# Altium PCB PCB_S.PcbDoc (part 1 of 2)
Units mm, origin at the board's own origin, x right, y up, seen from the top; angles counter-clockwise.
Board outline 160 x 80 mm, 4 copper layers (Top Layer, Layer 1, Layer 2, Bottom Layer), stack 0.603 mm thick; 122 components, 76 nets, 483 pads, 356 vias.
Unrouted connection lines stored in the file: 12.
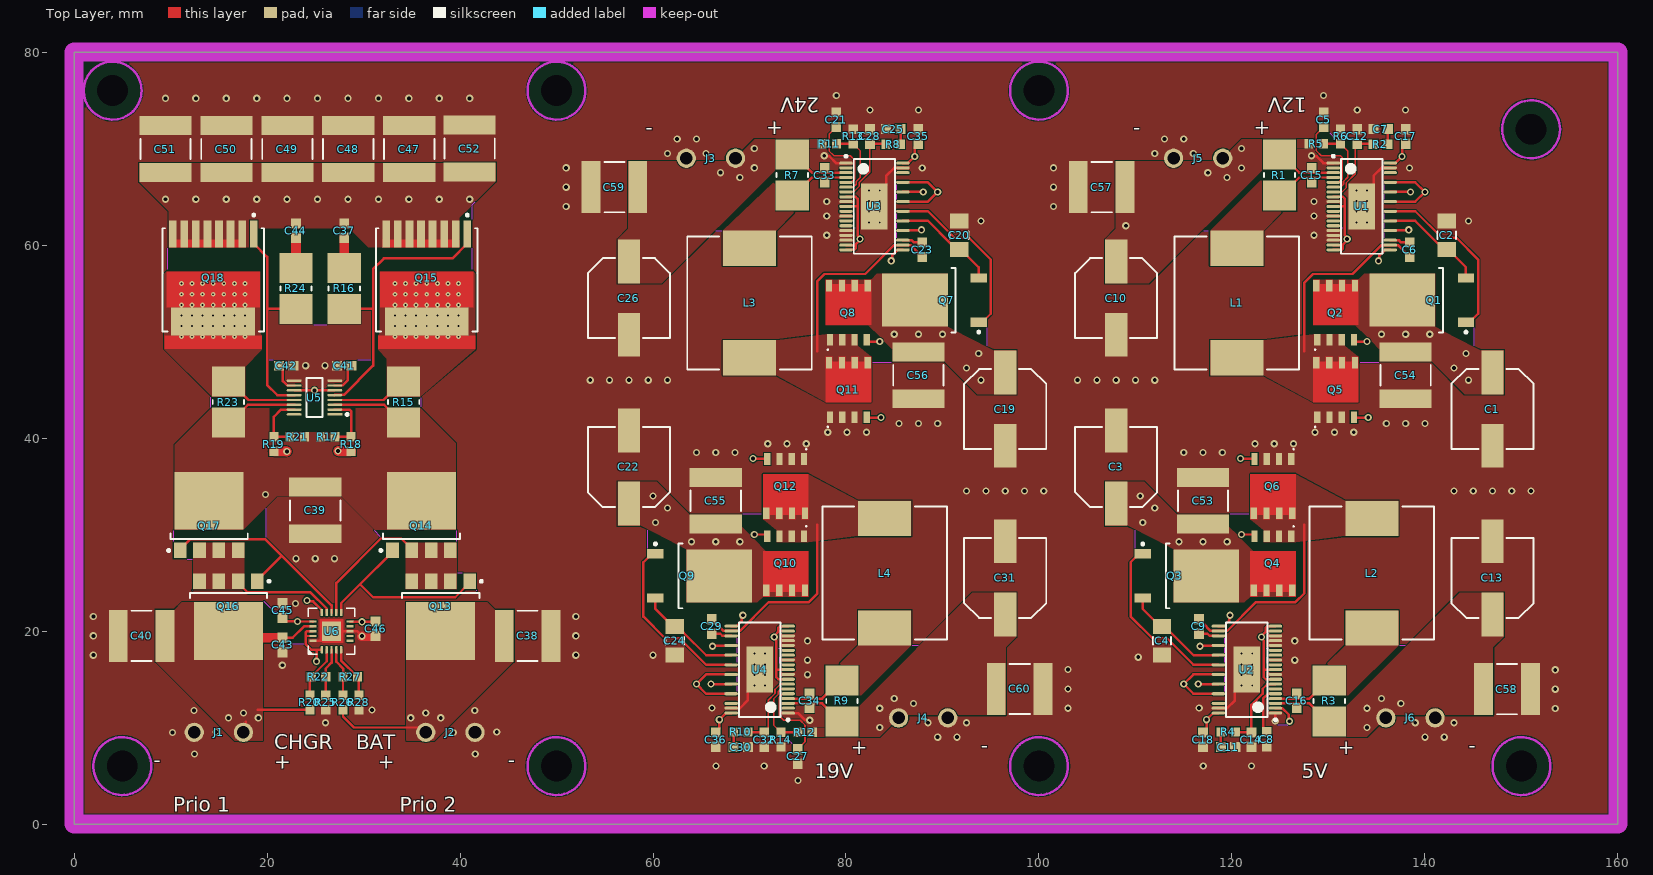
[diagram p0: Top Layer view]
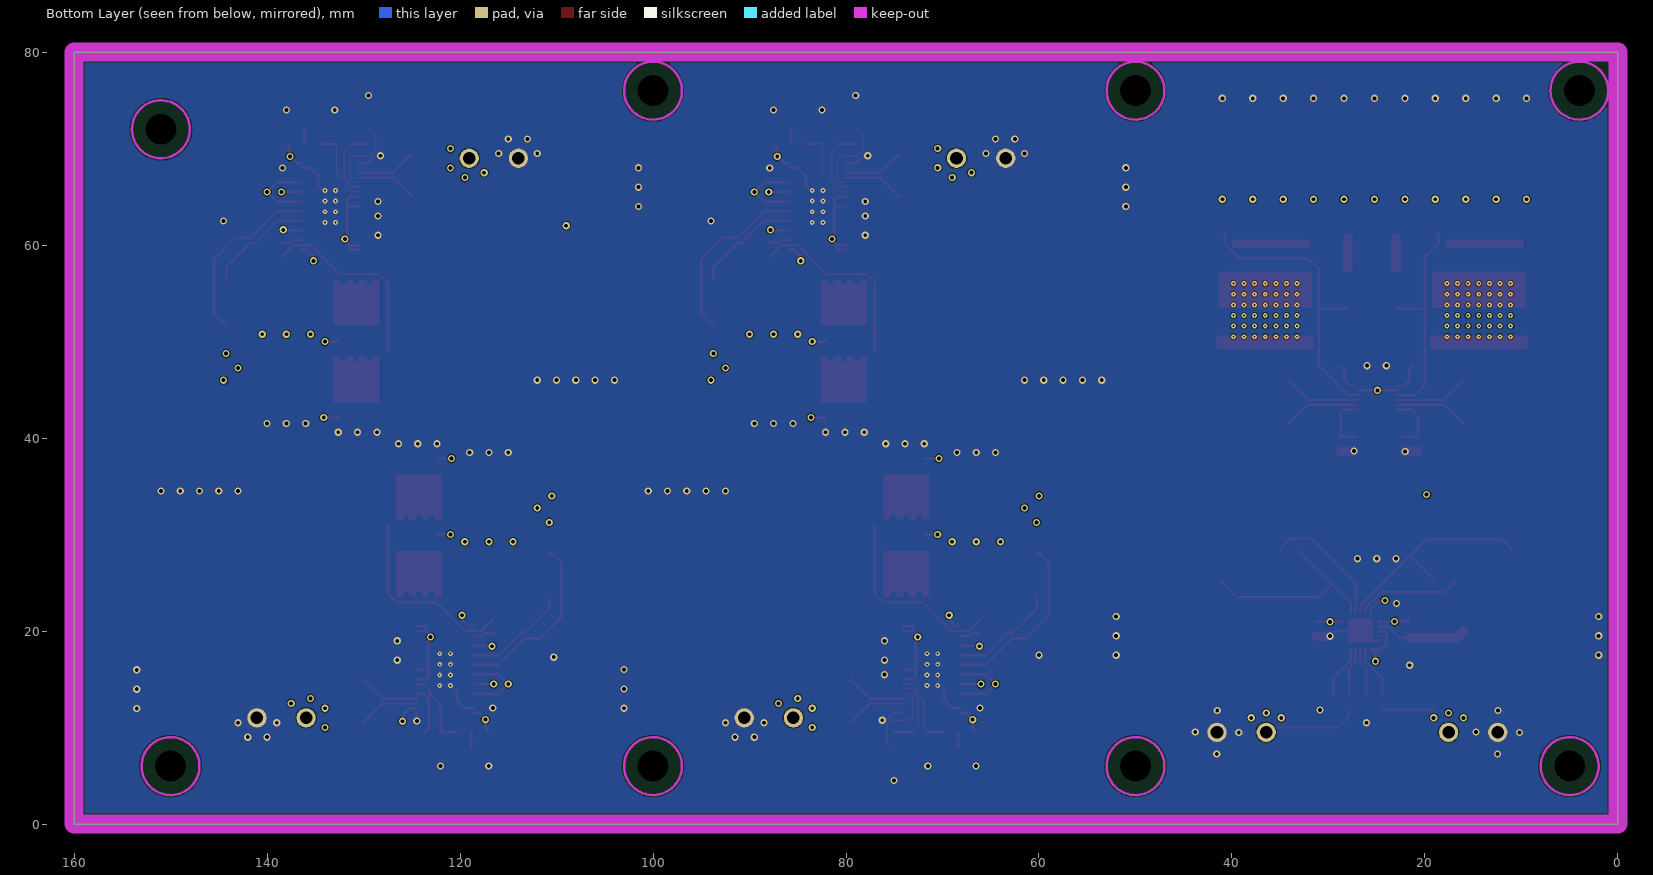
[diagram p1: Bottom Layer view, seen from below]
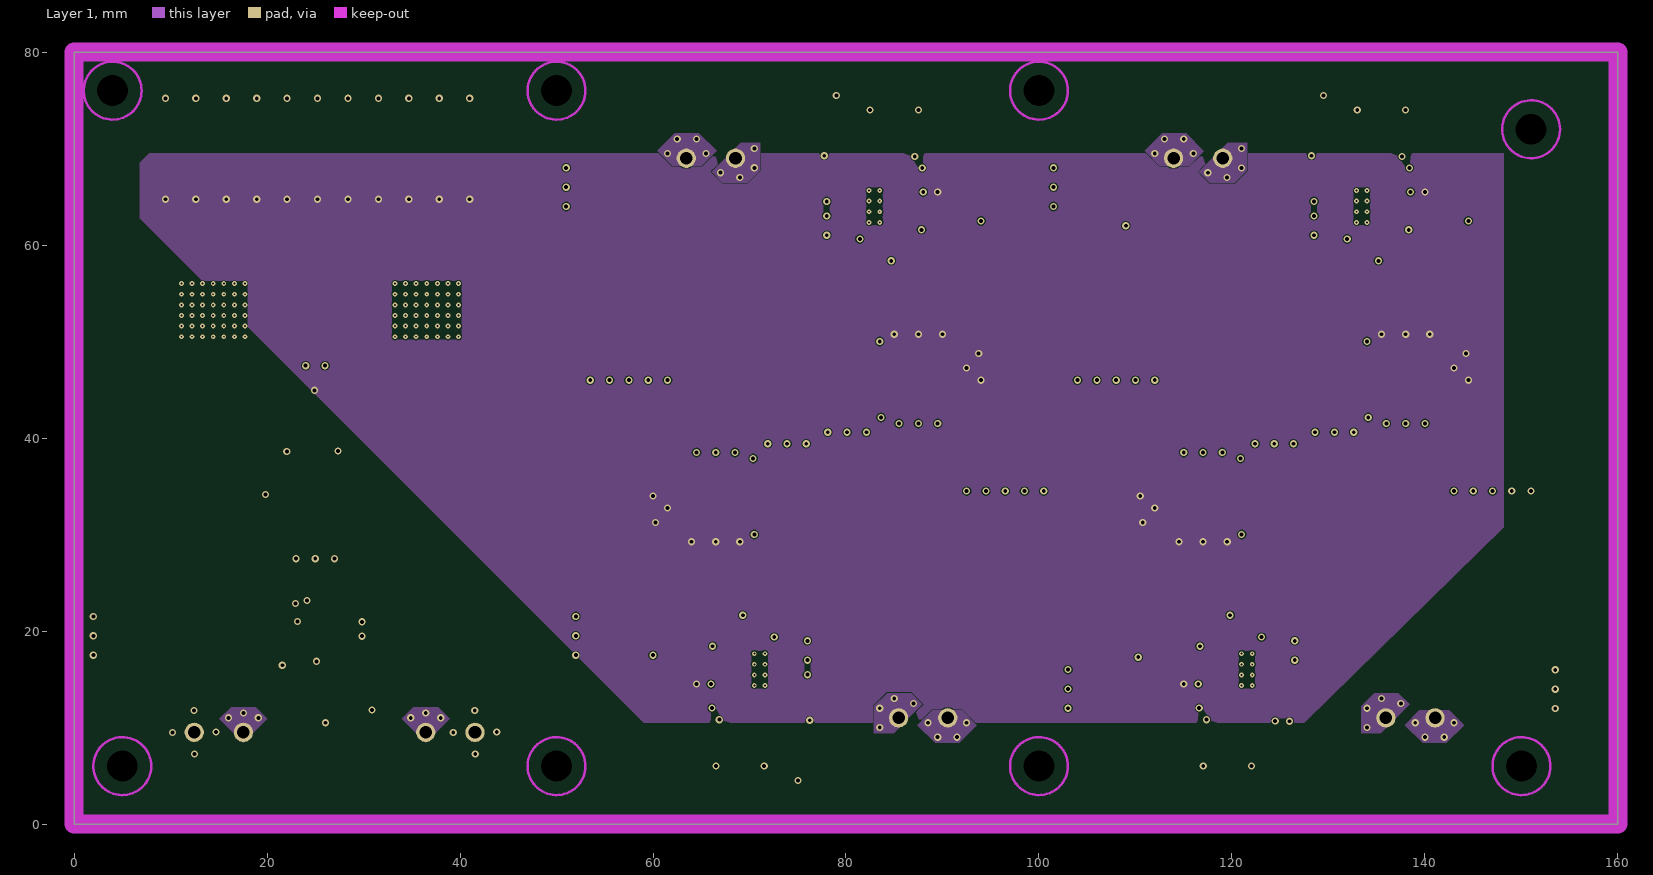
[diagram p2: Layer 1]
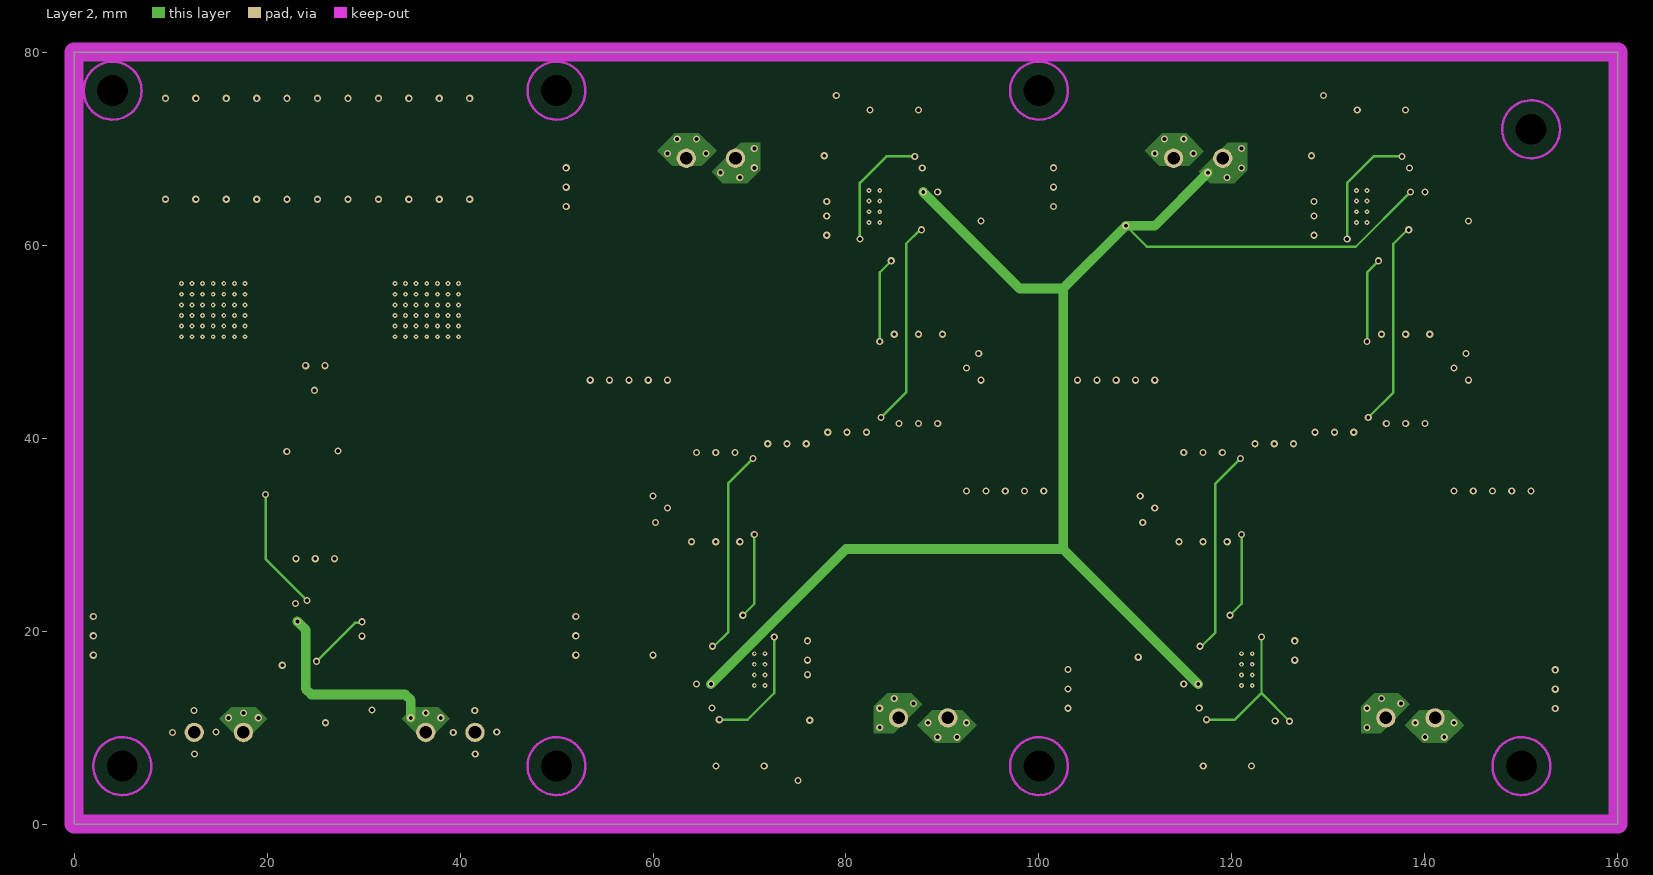
[diagram p3: Layer 2]
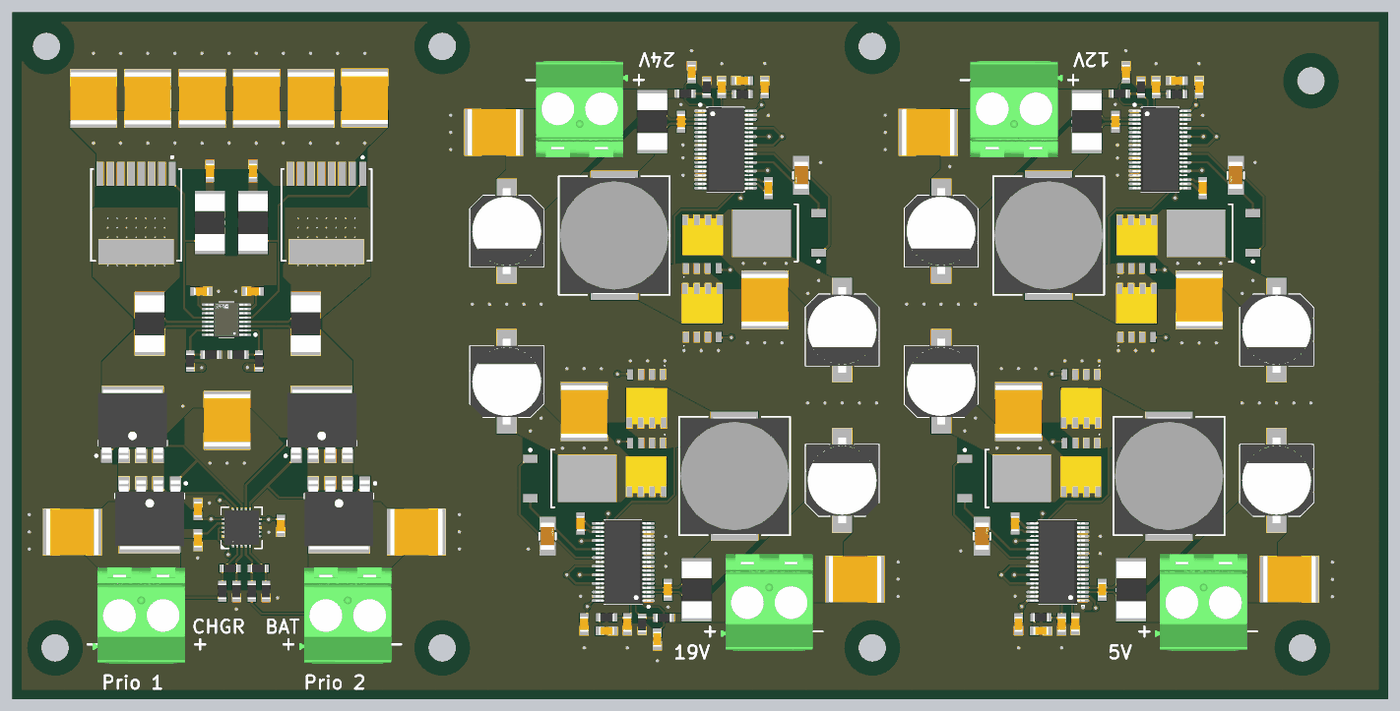
[diagram p5: 3D render of the assembled board from above, using the file's embedded part models]

## Layer stack, top to bottom
Top Solder: solder mask 0.0102, Solder Resist, Dk 3.5
Top Layer: signal copper 0.0356
Dielectric 2: prepreg 0.0711, PP-006, Dk 4.1
Layer 1: signal copper 0.035
Dielectric 1: dielectric 0.32, FR-4, Dk 4.8
Layer 2: signal copper 0.035
Dielectric 3: prepreg 0.0711, PP-006, Dk 4.1
Bottom Layer: signal copper 0.0356
Bottom Solder: solder mask 0.0102, Solder Resist, Dk 3.5

## Board outline
0,0 0,80 160,80 160,0

## Design rules (kind name [scope] priority, off if disabled: settings)
Clearance [All] p1: gap=0.1 ignorepadtopadclearanceinfootprint=TRUE
HoleSize [All] p1: absolutevalues=TRUE maxlimit=6.3 minlimit=0.025 maxpercent=80.000 minpercent=20.000
MinimumSolderMaskSliver [All] p1: minsoldermaskwidth=0.1
PolygonConnect [All] p1: connectstyle=Direct reliefconductorwidth=0.254 reliefentries=2 polygonreliefangle="90 Angle" airgapwidth=0.254
RoutingVias [All] p1: holewidth=0.711 width=1.27 viastyle="Through Hole" minholewidth=0.15 minwidth=0.25 maxholewidth=6.3 maxwidth=6.45
SilkToSolderMaskClearance [IsPad] p1: minsilkscreentomaskgap=0.15 clearancetoexposedcopper=TRUE
SolderMaskExpansion [All] p1: expansion=0.05 istentingtop=FALSE
SupplyNets "Schematic Supply Nets" [InNet('GND')] p1: voltage=0.000
Width [All] p1: maxlimit=1 minlimit=0.16 preferedwidth=0.254 minimp=50.000000 maximp=50.000000 favimp=50.000000
27 further rules are at their usual default settings.

## Classes and differential pairs
component class VoltageDivision: C1 C2 C3 C4 C5 C6 C7 C8 C9 C10 C11 C12 C13 C14 C15 C16 C17 C18 C19 C20 C21 C22 C23 C24 C25 C26 C27 C28 C29 C30 C31 C32 C33 C34 C35 C36 C57 C58 C59 C60 L1 L2 L3 L4 Q1 Q2 Q3 Q4 Q5 Q6 Q7 Q8 Q9 Q10 Q11 Q12 R1 R2 R3 R4 R5 R6 R7 R8 R9 R10 R11 R12 R13 R14 U1 U2 U3 U4
component class HotSwap: C37 C38 C39 C40 C41 C42 C43 C44 C45 C46 C47 C48 C49 C50 C51 C52 C53 C54 C55 C56 J1 J2 J3 J4 J5 J6 Q13 Q14 Q15 Q16 Q17 Q18 R15 R16 R17 R18 R19 R20 R21 R22 R23 R24 R25 R26 R27 R28 U5 U6

## Components (designator, comment, footprint, x,y, rotation, side; value= is the part's Value field where it differs from the comment)
C1 "EEE-FN1H151UP" CAPAE10083X105M 147,43 r270 top value=150µF
C2 "4.7uF 1206" FP-GRM31C-0_2-e0_3_0_8-IPC_A 142.25,61 r270 top value=4.7µF
C3 "EEE-FN1H151UP" CAPAE10083X105M 108,37 r90 top value=150µF
C4 "4.7uF 1206" FP-GRM31C-0_2-e0_3_0_8-IPC_A 112.75,19 r90 top value=4.7µF
C5 "100nF 0603" CAPC1608X10N 129.5,73 r90 top value=100nF
C6 "100nF 0603" CAPC1608X10N 138.417,59.528 r90 top value=100nF
C7 "CL10B472KB8NNNC" CAPC1608X10N 135.405,72.026 r0 top value=4.7nF
C8 "100nF 0603" CAPC1608X10N 123.6,8.775 r270 top value=100nF
C9 "100nF 0603" CAPC1608X10N 116.583,20.472 r270 top value=100nF
C10 "EEEFN1H181UP" CAPAE10083X105M 108,54.5 r270 top value=180µF
C11 "CL10B472KB8NNNC" CAPC1608X10N 119.595,7.974 r180 top value=4.7nF
C12 "100pF 0603" CAPC1608X10N 132.98,71.251 r270 top value=100pF
C13 "EEEFN1H181UP" CAPAE10083X105M 147,25.5 r90 top value=180µF
C14 "100pF 0603" CAPC1608X10N 122.02,8.749 r90 top value=100pF
C15 "1nF 0603" CAPC1608X10N 128.28,67.246 r90 top value=1nF
C16 "1nF 0603" CAPC1608X10N 126.72,12.754 r270 top value=1nF
C17 "100nF 0603" CAPC1608X10N 138,71.25 r270 top value=100nF
C18 "100nF 0603" CAPC1608X10N 117,8.75 r90 top value=100nF
C19 "EEE-FN1H151UP" CAPAE10083X105M 96.5,43 r270 top value=150µF
C20 "4.7uF 1206" FP-GRM31C-0_2-e0_3_0_8-IPC_A 91.75,61 r270 top value=4.7µF
C21 "100nF 0603" CAPC1608X10N 79,73 r90 top value=100nF
C22 "EEE-FN1H151UP" CAPAE10083X105M 57.5,37 r90 top value=150µF
C23 "100nF 0603" CAPC1608X10N 87.917,59.528 r90 top value=100nF
C24 "4.7uF 1206" FP-GRM31C-0_2-e0_3_0_8-IPC_A 62.25,19 r90 top value=4.7µF
C25 "CL10B472KB8NNNC" CAPC1608X10N 84.905,72.026 r0 top value=4.7nF
C26 "EEEFN1H181UP" CAPAE10083X105M 57.5,54.5 r270 top value=180µF
C27 "100nF 0603" CAPC1608X10N 75,7 r270 top value=100nF
C28 "100pF 0603" CAPC1608X10N 82.48,71.251 r270 top value=100pF
C29 "100nF 0603" CAPC1608X10N 66.083,20.472 r270 top value=100nF
C30 "CL10B472KB8NNNC" CAPC1608X10N 69.095,7.974 r180 top value=4.7nF
C31 "EEEFN1H181UP" CAPAE10083X105M 96.5,25.5 r90 top value=180µF
C32 "100pF 0603" CAPC1608X10N 71.52,8.749 r90 top value=100pF
C33 "1nF 0603" CAPC1608X10N 77.78,67.246 r90 top value=1nF
C34 "1nF 0603" CAPC1608X10N 76.22,12.754 r270 top value=1nF
C35 "100nF 0603" CAPC1608X10N 87.5,71.25 r270 top value=100nF
C36 "100nF 0603" CAPC1608X10N 66.5,8.75 r90 top value=100nF
C37 "CL10B103JB8NNNC" CAPC1608X10N 28,61.5 r90 top value=10nF
C38 "FS55X226K500EHG" CAPC5750X31N 47,19.5 r180 top value=22µF
C39 "FS55X226K500EHG" CAPC5750X31N 25,32.5 r90 top value=22µF
C40 "FS55X226K500EHG" CAPC5750X31N 7,19.5 r0 top value=22µF
C41 "100nF 0603" CAPC1608X10N 28,47.5 r180 top value=100nF
C42 "100nF 0603" CAPC1608X10N 22,47.5 r180 top value=100nF
C43 "100nF 0603" CAPC1608X10N 21.609,18.552 r270 top value=100nF
C44 "CL10B103JB8NNNC" CAPC1608X10N 23,61.5 r90 top value=10nF
C45 "100nF 0603" CAPC1608X10N 21.609,22.129 r90 top value=100nF
C46 "100nF 0603" CAPC1608X10N 31.246,20.225 r270 top value=100nF
C47 "FS55X226K500EHG" CAPC5750X31N 34.739,69.953 r270 top value=22µF
C48 "FS55X226K500EHG" CAPC5750X31N 28.421,69.953 r270 top value=22µF
C49 "FS55X226K500EHG" CAPC5750X31N 22.102,69.953 r270 top value=22µF
C50 "FS55X226K500EHG" CAPC5750X31N 15.784,69.953 r270 top value=22µF
C51 "FS55X226K500EHG" CAPC5750X31N 9.466,69.953 r270 top value=22µF
C52 "FS55X226K500EHG" CAPC5750X31N 41,70 r270 top value=22µF
C53 "FS55X226K500EHG" CAPC5750X31N 117,33.5 r270 top value=22µF
C54 "FS55X226K500EHG" CAPC5750X31N 138,46.5 r90 top value=22µF
C55 "FS55X226K500EHG" CAPC5750X31N 66.5,33.5 r270 top value=22µF
C56 "FS55X226K500EHG" CAPC5750X31N 87.5,46.5 r90 top value=22µF
C57 "FS55X226K500EHG" CAPC5750X31N 106.5,66 r180 top value=22µF
C58 "FS55X226K500EHG" CAPC5750X31N 148.5,13.975 r0 top value=22µF
C59 "FS55X226K500EHG" CAPC5750X31N 56,66 r180 top value=22µF
C60 "FS55X226K500EHG" CAPC5750X31N 98,14 r0 top value=22µF
J1 "1711725" 1711725-Footprint-1 15,9.5 r180 top
J2 "1711725" 1711725-Footprint-1 39,9.5 r180 top
J3 "1711725" 1711725-Footprint-1 66,69 r0 top
J4 "1711725" 1711725-Footprint-1 88,11 r180 top
J5 "1711725" 1711725-Footprint-1 116.5,69 r0 top
J6 "1711725" 1711725-Footprint-1 138.5,11 r180 top
L1 "6.8uH" INDP134126X50N 120.5,54 r90 top value=6.8µH
L2 "6.8uH" INDP134126X50N 134.5,26 r270 top value=6.8µH
L3 "6.8uH" INDP134126X50N 70,54 r90 top value=6.8µH
L4 "6.8uH" INDP134126X50N 84,26 r270 top value=6.8µH
Q1 "IPD320N20N3GATMA1" INF-PG-TO252-3-11_A_L 139.65,54.29 r180 top
Q2 "BSC028N06LS3GATMA1" INF-PG-TDSON-8-1_V 130.75,53 r0 top
Q3 "IPD320N20N3GATMA1" INF-PG-TO252-3-11_A_L 115.35,25.71 r0 top
Q4 "BSC028N06LS3GATMA1" INF-PG-TDSON-8-1_V 124.25,27 r180 top
Q5 "BSC028N06LS3GATMA1" INF-PG-TDSON-8-1_V 130.75,45 r0 top
Q6 "BSC028N06LS3GATMA1" INF-PG-TDSON-8-1_V 124.25,35 r180 top
Q7 "IPD320N20N3GATMA1" INF-PG-TO252-3-11_A_L 89.15,54.29 r180 top
Q8 "BSC028N06LS3GATMA1" INF-PG-TDSON-8-1_V 80.25,53 r0 top
Q9 "IPD320N20N3GATMA1" INF-PG-TO252-3-11_A_L 64.85,25.71 r0 top
Q10 "BSC028N06LS3GATMA1" INF-PG-TDSON-8-1_V 73.75,27 r180 top
Q11 "BSC028N06LS3GATMA1" INF-PG-TDSON-8-1_V 80.25,45 r0 top
Q12 "BSC028N06LS3GATMA1" INF-PG-TDSON-8-1_V 73.75,35 r180 top
Q13 "MOSFET P-channel" DPAK200P800X170-5N 38,21.5 r270 top
Q14 "MOSFET P-channel" DPAK200P800X170-5N 36,32 r90 top
Q15 "IPT007N06NATMA1" INF-PG-HSOF-8-1_V 36.553,55.899 r270 top
Q16 "MOSFET P-channel" DPAK200P800X170-5N 16,21.5 r270 top
Q17 "MOSFET P-channel" DPAK200P800X170-5N 14,32 r90 top
Q18 "IPT007N06NATMA1" INF-PG-HSOF-8-1_V 14.42,55.899 r270 top
R1 "FMF25FPJR004-LH" RESC6432X09N 124.925,67.25 r270 top value=4m
R2 "10k 0603" RESC1608X06N 135.393,70.451 r180 top value=10k
R3 "FMF25FPJR004-LH" RESC6432X09N 130.075,12.75 r90 top value=4m
R4 "10k 0603" RESC1608X06N 119.607,9.549 r0 top value=10k
R5 "100k 0603" RESC1608X06N 128.75,70.5 r180 top value=100k
R6 "6.98k 0603" RESC1608X06N 131.25,71.25 r270 top value=6.98k
R7 "FMF25FPJR004-LH" RESC6432X09N 74.425,67.25 r270 top value=4m
R8 "10k 0603" RESC1608X06N 84.893,70.451 r180 top value=10k
R9 "FMF25FPJR004-LH" RESC6432X09N 79.575,12.75 r90 top value=4m
R10 "10k 0603" RESC1608X06N 69.107,9.549 r0 top value=10k
R11 "806k 0603" RESC1608X06N 78.25,70.5 r180 top value=806k
R12 "200kR 0603" RESC1608X06N 75.75,9.5 r180 top value=200k
R13 "28k 0603" RESC1608X06N 80.75,71.25 r270 top value=28k
R14 "8.87k 0603" RESC1608X06N 73.25,8.75 r90 top value=8.87k
R15 "HoLLR2512-3W-3mR-1%" RESC6432X09N 34.15,43.721 r90 top value=3m
R16 "HOJLR2512-3W-10MR-1%" RESC6432X09N 28,55.5 r90 top value=10m
R17 "0603WAF1804T5E" RESC1608X06N 26.294,40.129 r180 top value=1.8M
R18 "100k 0603" RESC1608X06N 28.707,39.379 r90 top value=100k
R19 "100k 0603" RESC1608X06N 20.706,39.379 r90 top value=100k
R20 "0603WAF4643T5E" RESC1608X06N 24.441,12.594 r270 top value=464k
R21 "0603WAF1804T5E" RESC1608X06N 23.119,40.129 r180 top value=1.8M
R22 "ARG03FTC4001N" RESC1608X06N 25.33,15.261 r180 top value=4k
R23 "HoLLR2512-3W-3mR-1%" RESC6432X09N 16,43.721 r90 top value=3m
R24 "HOJLR2512-3W-10MR-1%" RESC6432X09N 23,55.5 r90 top value=10m
R25 "RC0603FR-0716KL" RESC1608X06N 26.092,12.594 r90 top value=16k
R26 "0603WAF4643T5E" RESC1608X06N 27.87,12.594 r270 top value=464k
R27 "ARG03FTC4001N" RESC1608X06N 28.632,15.261 r180 top value=4k
R28 "RC0603FR-0716KL" RESC1608X06N 29.521,12.594 r90 top value=16k
U1 "LTC3895EFE#PBF" TSSOP50P640X120_HS-39N 133.45,64 r0 top
U2 "LTC3895EFE#PBF" TSSOP50P640X120_HS-39N 121.55,16 r180 top
U3 "LTC3895EFE#PBF" TSSOP50P640X120_HS-39N 82.95,64 r0 top
U4 "LTC3895EFE#PBF" TSSOP50P640X120_HS-39N 71.05,16 r180 top
U5 "LTC4226IMS-2#TRPBF" FP-MS-16-05-08-1669-IPC_B 24.915,44.193 r180 top
U6 "LTC4418IUF" ADI-UF-20_V 26.683,19.983 r90 top

## Footprints (in the part's own frame and the unit in brackets; to place one, negate y for a bottom-side part, rotate by r counter-clockwise, add the part's x,y. Pads: shape width x height; smd on the part's side, far side on the other; paste and mask are expansions set on the pad)
1711725-Footprint-1 [mm]
  round 2 hole 1.3: 1(-2.55,0) 2(2.55,0)
  body extent -5.1,-5.89 5.63,5.29, height 18.3
ADI-UF-20_V [mm] "SMD, 20-Leads, Body 4x4mm, Pitch 0.5mm"
  rrect50% 0.75x0.25 smd: 1(-1.925,1) 2(-1.925,0.5) 3(-1.925,0) 4(-1.925,-0.5) 5(-1.925,-1) 11(1.925,-1) 12(1.925,-0.5) 13(1.925,0) 14(1.925,0.5) 15(1.925,1)
  rrect50% 0.25x0.75 smd: 6(-1,-1.925) 7(-0.5,-1.925) 8(0,-1.925) 9(0.5,-1.925) 10(1,-1.925) 16(1,1.925) 17(0.5,1.925) 18(0,1.925) 19(-0.5,1.925) 20(-1,1.925)
  rect 2x2 smd: 21(0,0)
  Top Layer region: -1.225,-1.175 -1.225,0.825 -1.225,0.837 -1.22,0.86 -1.211,0.882 -1.198,0.902 -1.19,0.91 -1.19,0.91 -0.91,1.19 -0.902,1.198 -0.882,1.211 -0.86,1.22 -0.837,1.225 -0.825,1.225 -0.825,1.225 1.175,1.225 1.185,1.225 1.203,1.217 1.217,1.203 1.225,1.185 1.225,1.175 1.225,1.175 1.225,-1.175 1.225,-1.185 1.217,-1.203 1.203,-1.217 1.185,-1.225 1.175,-1.225 1.175,-1.225 -1.175,-1.225 -1.185,-1.225 -1.203,-1.217 -1.217,-1.203 -1.225,-1.185 -1.225,-1.175
  silkscreen extent -2.4,-2.4 2.4,2.4, body extent -2.04,-2.04 2.04,2.04, height 0.81
CAPAE10083X105M [mm] "Aluminum Electrolytic Capacitor, Body 8.30x8.30x10.50mm, IPC Low Density"
  rect 4.55x2.3 smd: 1(-3.8,0) 2(3.8,0)
  silkscreen extent -4.15,-4.25 4.15,4.25, body extent -5,-4.25 5,4.25, height 10.5
CAPC1608X10N [mm] "Chip Capacitor, 2-Leads, Body 1.60x0.80mm, IPC Medium Density"
  rect 1.05x1 smd: 1(-0.75,0) 2(0.75,0)
  body extent -0.87,-0.48 0.87,0.48, height 0.95
CAPC5750X31N [mm] "Chip Capacitor, 2-Leads, Body 5.70x5.00mm, IPC Medium Density"
  rect 1.95x5.4 smd: 1(-2.425,0) 2(2.425,0)
  silkscreen extent -1.05,-2.6 1.05,2.6, body extent -3.05,-2.7 3.05,2.7, height 3.1
DPAK200P800X170-5N [mm] "TO, 5-Pads, Body 6.26x7.36mm (max), IPC Medium Density"
  rect 6x7.15 smd: D(1.5,0)
  rect 1.6x1.3 smd: G(-3.65,3) S(-3.65,-1) S(-3.65,1) S(-3.65,-3)
  silkscreen extent -3.77,-4 -1.9,4.33, body extent -3.98,-4 4.02,4, height 1.83
FP-GRM31C-0_2-e0_3_0_8-IPC_A [mm]
  rect 1.555x1.906 smd paste+0 mask+0: 1(-1.476,0) 2(1.476,0)
  silkscreen extent -0.4,-0.95 0.4,0.95, body extent -2.75,-1.45 2.75,1.45, height 0.25
FP-MS-16-05-08-1669-IPC_B [mm]
  rect 1.54x0.252 smd paste+0 mask+0: 1(-2.11,1.75)
  rrect100% 1.54x0.252 smd paste+0 mask+0: 2(-2.11,1.25) 3(-2.11,0.75) 4(-2.11,0.25) 5(-2.11,-0.25) 6(-2.11,-0.75) 7(-2.11,-1.25) 8(-2.11,-1.75) 9(2.11,-1.75) 10(2.11,-1.25) 11(2.11,-0.75) 12(2.11,-0.25) 13(2.11,0.25) 14(2.11,0.75) 15(2.11,1.25) 16(2.11,1.75)
  silkscreen extent -3.51,-2.02 0.84,2.02, body extent -3.13,-2.27 3.13,2.27, height 0.25
INDP134126X50N [mm] "Precision Wire Wound Inductor, 2-Leads, Body 13.45x12.60mm, IPC Medium Density"
  rect 3.65x5.5 smd: 1(-5.675,0) 2(5.675,0)
  silkscreen extent -6.9,-6.45 6.9,6.45, body extent -6.83,-6.3 6.83,6.3, height 5.1
INF-PG-HSOF-8-1_V [mm] "HSOF, 8-Leads, Body 11.675x9.9mm, Pitch 1.2mm"
  rect 2.9x8.7 smd: D(3.8,0)
  rect 2.8x0.8 smd: G(-5.249,4.2) S(-5.249,3) S(-5.249,-1.8) S(-5.249,-0.6) S(-5.249,0.6) S(-5.249,1.8) S(-5.249,-4.2) S(-5.249,-3)
  Top Layer region: -1.35,4.85 -1.35,-4.85 2.35,-4.85 2.35,4.85
  Top Layer region: 5.25,5.05 5.25,-5.05 6.65,-5.05 6.65,5.05
  Top Layer region: -4.65,3.4 -4.65,-4.6 -3.85,-4.6 -3.85,3.4
  silkscreen extent -7.32,-5.25 4.85,5.25, body extent -5.84,-4.95 5.84,4.95, height 2.4
INF-PG-TDSON-8-1_V [mm] "TDSON, 8-Leads, Body 6.15x5.15mm, Pitch 1.27mm"
  rect 0.65x1.2 smd: D(-2.007,2.794) D(-0.66,2.794) D(0.66,2.794) D(2.007,2.794) G(1.905,-2.825) S(-1.905,-2.825) S(-0.635,-2.825) S(0.635,-2.825)
  Top Layer region: -2.35,2.925 -2.35,-1.27 2.35,-1.27 2.35,2.925
  Top Layer region: -2.35,2.925 -1.65,2.925 -1.65,3.425 -2.35,3.425
  Top Layer region: 1.65,2.925 2.35,2.925 2.35,3.425 1.65,3.425
  Top Layer region: -1.015,2.925 -0.315,2.925 -0.315,3.425 -1.015,3.425
  Top Layer region: 0.315,2.925 1.015,2.925 1.015,3.425 0.315,3.425
  silkscreen extent -2.23,-3.94 -2.03,-3.74, body extent -2.58,-3.08 2.58,3.08, height 1
INF-PG-TO252-3-11_A_L [mm] "DPAK, 3-Leads, Body 6.57x6.1mm, Pitch 2.29mm, IPC High Density"
  rect 1.7x0.95 smd: 1(-4.6,2.29) 3(-4.6,-2.29)
  rect 6.8x5.5 smd: 2(2,0)
  silkscreen extent -4.72,-3.35 -1.8,3.44, body extent -2.2,-3.37 4.02,3.37, height 2.41
RESC1608X06N [mm] "Chip Resistor, 2-Leads, Body 1.60x0.80mm, IPC Medium Density"
  rect 0.95x0.95 smd: 1(-0.75,0) 2(0.75,0)
  body extent -0.87,-0.48 0.87,0.48, height 0.55
RESC6432X09N [mm] "Chip Resistor, 2-Leads, Body 6.35x3.18mm, IPC Medium Density"
  rect 3.1x3.45 smd: 1(-2.125,0) 2(2.125,0)
  silkscreen extent -0.2,-1.63 0.2,1.63, body extent -3.3,-1.72 3.3,1.72, height 0.89
TSSOP50P640X120_HS-39N [mm] "TSSOP, 38-Leads, Body 9.70x4.40mm, Pitch 0.50mm, Thermal Pad 4.75x2.74mm, IPC Medium Density"
  oval 1.4x0.315 smd mask+0.02: 1(-2.95,4.5) 2(-2.95,4) 3(-2.95,3.5) 4(-2.95,3) 5(-2.95,2.5) 6(-2.95,2) 7(-2.95,1.5) 8(-2.95,1) 9(-2.95,0.5) 10(-2.95,0) 11(-2.95,-0.5) 12(-2.95,-1) 13(-2.95,-1.5) 14(-2.95,-2) 15(-2.95,-2.5) 16(-2.95,-3) 17(-2.95,-3.5) 18(-2.95,-4) 19(-2.95,-4.5) 20(2.95,-4.5) 21(2.95,-4) 22(2.95,-3.5) 24(2.95,-2.5) 26(2.95,-1.5) 28(2.95,-0.5) 30(2.95,0.5) 32(2.95,1.5) 34(2.95,2.5) 36(2.95,3.5) 37(2.95,4) 38(2.95,4.5)
  rect 2.74x4.75 smd: 39(0,0)
  silkscreen extent -3.07,-4.9 2.15,5.33, body extent -3.2,-4.9 3.2,4.9, height 1.2

## Part data
C1 C3 C19 C22: library part CMP-001-00111-2, "Cap Aluminum 150uF 50V 20% Cylindrical 0.34 Ohm 350mA 2000 hr 105°C Emboss T/R", Capacitor Type="Aluminum Electrolytic", Voltage Rating=50V, ComponentLink1Description=JLCPCB, ComponentLink1URL=https://jlcpcb.com/partdetail/Panasonic-EEEFN1H151UP/C494857, ComponentLink2Description=Datasheet, ComponentLink2URL=https://wmsc.lcsc.com/wmsc/upload/file/pdf/v2/lcsc/2401161636_PANASONIC-EEEFN1H151UP_C494857.pdf, Mounting Technology=SMD, Pins=2
C2 C4 C20 C24: library part CMP-001-00105-1, "Ceramic Capacitor, Multilayer, Ceramic, 50V, 10% +Tol, 10% -Tol, X7R, 15% TC, 4.7uF, Surface Mount, 1206", Capacitor Type=Ceramic, Case/Package=1206, Max Operating Temperature=125°C, Min Operating Temperature=-55°C, Temperature Characteristics Code=X7R, Tolerance  (fill in as +-)=10%, Height=1.6mm, Length=3.2mm, Mounting Technology="Surface Mount", Multilayer=Yes, Pins=2, RoHS Compliant=Yes, Tolerance (fill in as +-)=10%, Width=1.6mm
C5 C6 C8 C9 C17 C18 C21 C23 C27 C29 C35 C36 C41 C42 C43 C45 C46: library part CMP-001-00096-5, "Ceramic Capacitor, Multilayer, Ceramic, 50V, 5% +Tol, 5% -Tol, X7R, 15% TC, 0.1uF, Surface Mount, 0603", Capacitor Type=Ceramic, Case/Package=0603, Max Operating Temperature=125°C, Min Operating Temperature=-55°C, Tolerance=5%, Voltage Rating=100V, ComponentLink1Description=JLCPCB, ComponentLink1URL=https://jlcpcb.com/partdetail/25192-CL10B104JB8NNNC/C24452, ComponentLink2Description=Datasheet, ComponentLink2URL=https://jlcpcb.com/api/file/downloadByFileSystemAccessId/8563426422237782016, Mounting Technology=SMD, Pins=2, RoHS Compliant=Yes
C7 C11 C25 C30: library part CMP-001-00109-2, "Ceramic Capacitor, Multilayer, Ceramic, 50V, 10% +Tol, 10% -Tol, X7R, 15% TC, 0.0047uF, Surface Mount, 0603", Capacitor Type=Ceramic, Case/Package=0603, Max Operating Temperature=125°C, Min Operating Temperature=-55°C, Rated DC Voltage (URdc)=50V, Temperature Characteristics Code=X7R, Tolerance  (fill in as +-)=10%, Height=0.9mm, Length=1.6mm, Mounting Technology="Surface Mount", Pins=2, RoHS Compliant=Yes, Tolerance (fill in as +-)=10%, Width=0.8mm
C10 C13 C26 C31: library part CMP-001-00102-4, "Cap Aluminum 180uF 50V 20% Cylindrical 0.34 Ohm 350mA 2000 hr 105°C Emboss T/R", Capacitor Type=Aluminium, Case/Package=3333, Ripple Current=350mA, Tolerance=20%, Voltage Rating=50V, ComponentLink1Description=JLCPCB, ComponentLink1URL=https://jlcpcb.com/partdetail/Panasonic-EEEFN1H181UP/C494858, Mounting Technology=SMD, Pins=2, RoHS Compliant=Y
C12 C14 C28 C32: library part CMP-001-00098-6, "50V 100pF C0G ±5% 0603 Multilayer Ceramic Capacitors MLCC - SMD/SMT ROHS", Capacitor Type=Ceramic, Case/Package=0603, Max Operating Temperature=125°C, Min Operating Temperature=-55°C, Tolerance=5%, Voltage Rating=50V, ComponentLink1Description=JLCPCB, ComponentLink1URL=https://jlcpcb.com/partdetail/15530-CL10C101JB8NNNC/C14858, ComponentLink2Description=Datasheet, ComponentLink2URL=https://jlcpcb.com/api/file/downloadByFileSystemAccessId/8579707092674142208, Mounting Technology=SMD, Pins=2, RoHS Compliant=Yes
C15 C16 C33 C34: library part CMP-001-00101-2, "50V 1nF X7R ±10% 0603 Multilayer Ceramic Capacitors MLCC - SMD/SMT ROHS", Capacitor Type=Ceramic, Case/Package=0603, Max Operating Temperature=125°C, Min Operating Temperature=-55°C, ComponentLink1Description=JLCPCB, ComponentLink1URL=https://jlcpcb.com/partdetail/1940-CL10B102KB8NNNC/C1588, ComponentLink2Description=Datasheet, ComponentLink2URL=https://jlcpcb.com/api/file/downloadByFileSystemAccessId/8579706978448228352, Mounting Technology="Surface Mount", Pins=2, RoHS Compliant=Yes
C37 C44: library part CMP-001-00110-2, "Ceramic Capacitor, Multilayer, Ceramic, 50V, 5% +Tol, 5% -Tol, X7R, 15% TC, 0.01uF, Surface Mount, 0603", Capacitor Type=Ceramic, Case/Package=0603, Max Operating Temperature=125°C, Min Operating Temperature=-55°C, Rated DC Voltage (URdc)=50V, Temperature Characteristics Code=X7R, Tolerance  (fill in as +-)=5%, Height=0.9mm, Length=1.6mm, Mounting Technology="Surface Mount", Pins=2, Reach SVHC Compliant=Yes, RoHS Compliant=Yes, Tolerance (fill in as +-)=5%
C38 C39 C40 C47 C48 C49 C50 C51 C52 C53 C54 C55 C56 C57 C58 C59 C60: library part CMP-001-00107-1, "50V 22uF X7R ±10% 2220  Multilayer Ceramic Capacitors MLCC - SMD/SMT ROHS", Capacitor Type=Ceramic, Case/Package=2220, Tolerance=10%, Voltage Rating=50V, ComponentLink1Description=JLCPCB, ComponentLink1URL=https://jlcpcb.com/partdetail/839503-FS55X226K500EHG/C784103, Mounting Technology=SMD, Pins=2
J1 J2 J3 J4 J5 J6: library part CMP-002-00071-8, "Barrier Strip Terminal Block, 24A, 2.5mm2, 1 Row(s), 1 Deck(s)", Current Rating=24A, Voltage Rating=400V, Fastening Method=SCREW, Mounting Technology=Board, RoHS Compliant=Yes, Wire/Cable Gauge=12AWG
L1 L2 L3 L4: library part CMP-006-00025-2, "12A 6.8uH ±20% 16A SMD,13.5x12.6mm  Power Inductors ROHS", Current Rating=12A, Max Current Rating=16A, Tolerance=20%, ComponentLink1Description=JLCPCB, ComponentLink1URL=https://jlcpcb.com/partdetail/Sunlord-MWSA1205S6R8MT/C408515, ComponentLink2Description=Datasheet, ComponentLink2URL=https://jlcpcb.com/api/file/downloadByFileSystemAccessId/8552175007686930432, Mounting Technology=SMD, Pins=2
Q1 Q3 Q7 Q9: library part CMP-013-00038-2, "Power Field-Effect Transistor, 34A I(D), 200V, 0.032ohm, 1-Element, N-Channel, Silicon, Metal-oxide Semiconductor FET, TO-252AA", Case Connection=DRAIN, Drain Current-Max (ID)=34A, Drain-source On Resistance-Max=32mR, DS Breakdown Voltage-Min=200V, Operating Mode="ENHANCEMENT MODE", Number of Elements=1, Pins=2, Polarity/Channel Type=N-CHANNEL, RoHS Compliant=Yes, Surface Mount=Yes, Transistor Application=SWITCHING
Q2 Q4 Q5 Q6 Q8 Q10 Q11 Q12: library part CMP-013-00040-2, "Power Field-Effect Transistor, 100A I(D), 60V, 0.0028ohm, 1-Element, N-Channel, Silicon, Metal-oxide Semiconductor FET", Case Connection=DRAIN, Drain Current-Max (ID)=23A, Drain-source On Resistance-Max=2.8mR, DS Breakdown Voltage-Min=60V, Max Operating Temperature=150°C, Operating Mode="ENHANCEMENT MODE", Pins=8, Polarity/Channel Type=N-CHANNEL, RoHS Compliant=Yes, Surface Mount=Yes
Q13 Q14 Q16 Q17: library part CMP-013-00037-4, "Power MOSFET, P Channel, 40 V, 390 A, 0.0014 ohm, PowerPAK, Surface Mount", Case/Package=PowerPAK, Max Operating Temperature=175°C, Min Operating Temperature=-55°C, Power=600W, ComponentLink1Description=Farnell, ComponentLink1URL=https://ee.farnell.com/vishay/sqjq141el-t1-ge3/mosfet-p-ch-40v-390a-powerpak/dp/3777512, ComponentLink2Description=Datasheet, ComponentLink2URL=http://www.farnell.com/datasheets/3296212.pdf, Mounting Technology=SMD, Pins=4, Production ID=SQJQ141EL-T1_GE3, Transistor Type=P-channel
Q15 Q18: library part CMP-013-00042-2, "Power Field-Effect Transistor, 52A I(D), 60V, 0.00075ohm, 1-Element, N-Channel, Silicon, Metal-oxide Semiconductor FET", Avalanche Energy Rating (Eas)=1100mJ, Case Connection=DRAIN, Drain Current-Max (ID)=52A, Drain-source On Resistance-Max=0.75mR, DS Breakdown Voltage-Min=60V, Operating Mode="ENHANCEMENT MODE", Pulsed Drain Current-Max (IDM)=1.2kA, ComponentLink1Description=JLCPCB, ComponentLink1URL=https://jlcpcb.com/partdetail/InfineonTechnologies-IPT007N06N/C122552, Pins=2, Polarity/Channel Type=N-CHANNEL, RoHS Compliant=Yes, Surface Mount=Yes
R1 R3 R7 R9: library part CMP-009-00199-3, "2W 4mΩ ±50ppm/℃ ±1% 2512  Current Sense Resistors/Shunt Resistors ROHS", Case/Package=2512, Power=2W, Tolerance=1%, ComponentLink1Description=JLCPCB, ComponentLink1URL=https://jlcpcb.com/partdetail/106603-FMF25FPJR004LH/C105388, ComponentLink2Description=Datasheet, ComponentLink2URL=https://jlcpcb.com/api/file/downloadByFileSystemAccessId/8588898600813912064, Mounting Technology=SMD, Pins=2, RoHS Compliant=Y
R2 R4 R8 R10: library part CMP-009-00179-6, "Fixed Resistor, Metal Glaze/thick Film, 0.1W, 10000ohm, 75V, 1% +/-Tol, 100ppm/Cel, Surface Mount, 0603", Case/Package=0603, Max Operating Temperature=155°C, Min Operating Temperature=-55°C, Package Height=0.45mm, Package Length=1.6mm, Package Width=0.8mm, Power=100mW, Tolerance=1%, Voltage Rating=75V, ComponentLink1Description=Farnell, ComponentLink1URL=https://ee.farnell.com/panasonic/erju3rd1002v/res-10k-0-5-0-1w-0603/dp/3597621, ComponentLink2Description=Datasheet, ComponentLink2URL=https://4donline.ihs.com/images/VipMasterIC/IC/PANA/PANA-S-A0017042869/PANA-S-A0017226718-1.pdf?hkey=6D3A4C79FDBF58556ACFDE234799DDF0, ComponentLink3Description=JLCPCB, ComponentLink3URL=https://jlcpcb.com/partdetail/Panasonic-ERJ3EKF1002V/C191124, Mounting Technology="Surface Mount", Pins=2, Production ID=ERJ3EKF1002V, RoHS Compliant=Yes
R5 R18 R19: library part CMP-009-00184-4, "100mW Thick Film Resistors 75V ±100ppm/℃ ±1% 100kΩ 0603 Chip Resistor - Surface Mount ROHS", Case/Package=0603, Max Operating Temperature=155°C, Min Operating Temperature=-55°C, Package Height=0.45mm, Package Length=1.6mm, Package Width=0.8mm, Power=100mW, Tolerance=1%, Voltage Rating=75V, ComponentLink1Description=JLCPCB, ComponentLink1URL=https://jlcpcb.com/partdetail/Yageo-RC0603FR07100KL/C14675, ComponentLink2Description=Datasheet, ComponentLink2URL=https://www.lcsc.com/datasheet/lcsc_datasheet_1809281124_YAGEO-RC0603FR-07100KL_C14675.pdf, Mounting Technology=SMD, Pins=2, Production ID=ERJ3EKF1003V, RoHS Compliant=Yes
R6: library part CMP-009-00197-2, "100mW Thick Film Resistors 75V ±100ppm/℃ ±1% 6.98kΩ 0603 Chip Resistor - Surface Mount ROHS", Case/Package=0603, Power=100mW, Tolerance=1%, Voltage Rating=75V, ComponentLink1Description=JLCPCB, ComponentLink1URL=https://jlcpcb.com/partdetail/23942-0603WAF6981T5E/C23215, ComponentLink2Description=Datasheet, ComponentLink2URL=https://www.lcsc.com/datasheet/lcsc_datasheet_2206010116_UNI-ROYAL-Uniroyal-Elec-0603WAF6981T5E_C23215.pdf, Mounting Technology=SMD, Pins=2
R11: library part CMP-009-00206-2, "Fixed Resistor, Metal Glaze/thick Film, 0.1W, 806000ohm, 75V, 1% +/-Tol, 100ppm/Cel, Surface Mount, 0603", Case/Package=0603, Max Operating Temperature=155°C, Min Operating Temperature=-55°C, Package Height=0.45mm, Package Length=1.6mm, Package Width=0.8mm, Power=100mW, Tolerance=1%, Working Voltage=75V, Mounting Technology="Surface Mount", Pins=2, RoHS Compliant=Yes
R12: library part CMP-009-00204-2, "Fixed Resistor, Metal Glaze/thick Film, 0.1W, 200000ohm, 75V, 1% +/-Tol, 100ppm/Cel, Surface Mount, 0603", Case/Package=0603, Max Operating Temperature=155°C, Min Operating Temperature=-55°C, Package Height=0.45mm, Package Length=1.6mm, Package Width=0.8mm, Power=100mW, Tolerance=1%, Mounting Technology="Surface Mount", Pins=2, RoHS Compliant=Yes
R13: library part CMP-009-00207-2, "Fixed Resistor, Metal Glaze/thick Film, 0.1W, 28000ohm, 75V, 1% +/-Tol, 100ppm/Cel, Surface Mount, 0603", Case/Package=0603, Max Operating Temperature=155°C, Min Operating Temperature=-55°C, Package Height=0.45mm, Package Length=1.6mm, Package Width=0.8mm, Power=100mW, Tolerance=1%, Mounting Technology="Surface Mount", Pins=2, RoHS Compliant=Yes
R14: library part CMP-009-00205-2, "Fixed Resistor, Metal Glaze/thick Film, 0.1W, 8870ohm, 75V, 1% +/-Tol, 100ppm/Cel, Surface Mount, 0603", Case/Package=0603, Max Operating Temperature=155°C, Min Operating Temperature=-55°C, Package Height=0.45mm, Package Length=1.6mm, Package Width=0.8mm, Power=100mW, Rated Temperature=70°C, Tolerance=1%, Working Voltage=75V, Mounting Technology="Surface Mount", Pins=2, RoHS Compliant=Yes
R15 R23: library part CMP-009-00201-3, "3W 3mΩ Chip Current Sensing Resistors ±50ppm/℃ ±1% 2512  Current Sense Resistors / Shunt Resistors ROHS", Case/Package=2512, Power=3W, Tolerance=1%, ComponentLink1Description=JLCPCB, ComponentLink1URL=https://jlcpcb.com/partdetail/Milliohm-HoLLR2512_3W_3mR_1/C2994641, ComponentLink2Description=Datasheet, ComponentLink2URL=https://wmsc.lcsc.com/wmsc/upload/file/pdf/v2/lcsc/2204121445_Milliohm-HoLLR2512-3W-3mR-1-_C2994641.pdf, Mounting Technology=SMD, Pins=2
R16 R24: library part CMP-009-00212-3, "3W 10mΩ Solder Pad Current Sensing Resistors ±1% 2512 Current Sense Resistors / Shunt Resistors ROHS", Case/Package=2512, Power=3W, Tolerance=1%, ComponentLink1Description=JLCPCB, ComponentLink1URL=https://jlcpcb.com/partdetail/Milliohm-HoJLR2512_3W_10mR_1/C2903468, Mounting Technology=SMD, Pins=2
R17 R21: library part CMP-009-00208-3, "Fixed Resistor, Metal Glaze/thick Film, 0.1W, 1800000ohm, 50V, 1% +/-Tol, 100ppm/Cel, Surface Mount, 0603", Case/Package=0603, Power=100mW, Tolerance=1%, Voltage Rating=50V, ComponentLink1Description=JLCPCB, ComponentLink1URL=https://jlcpcb.com/partdetail/13965-0603WAF1804T5E/C13318, ComponentLink2Description=Datasheet, ComponentLink2URL=https://jlcpcb.com/api/file/downloadByFileSystemAccessId/8586177284231876608, Mounting Technology=SMD, Pins=2
R20 R26: library part CMP-009-00209-2, "100mW Thick Film Resistors 75V ±100ppm/℃ ±1% 464kΩ 0603 Chip Resistor - Surface Mount ROHS", Power=100mW, Tolerance=1%, Voltage Rating=75V, Mounting Technology=SMD, Pins=2, RoHS Compliant=Y
R22 R27: library part CMP-009-00210-2, "Thin Film Resistor ±1% 4kΩ 0603  Chip Resistor - Surface Mount ROHS", Case/Package=0603, Tolerance=1%, Voltage Rating=75V, ComponentLink1Description=JLCPCB, ComponentLink1URL=https://jlcpcb.com/partdetail/VikingTech-ARG03FTC4001N/C2984443, ComponentLink2Description=Datasheet, ComponentLink2URL=https://wmsc.lcsc.com/wmsc/upload/file/pdf/v2/lcsc/2208091800_Viking-Tech-ARG03FTC4001N_C2984443.pdf, Mounting Technology=SMD, Pins=2
R25 R28: library part CMP-009-00211-2, "Fixed Resistor, Metal Glaze/thick Film, 0.1W, 16000ohm, 75V, 1% +/-Tol, 100ppm/Cel, Surface Mount, 0603", Case/Package=0603, Max Operating Temperature=155°C, Min Operating Temperature=-55°C, Package Height=0.45mm, Package Length=1.6mm, Package Width=0.8mm, Power=100mW, Tolerance=1%, Voltage Rating=75V, ComponentLink1Description=JLCPCB, ComponentLink1URL=https://jlcpcb.com/partdetail/Yageo-RC0603FR0716KL/C137788, ComponentLink2Description=Datasheet, ComponentLink2URL=https://www.lcsc.com/datasheet/lcsc_datasheet_2304140030_YAGEO-RC0603FR-0716KL_C137788.pdf, Construction=Chip, Mounting Technology="Surface Mount", Pins=2, RoHS Compliant=Yes, Working Voltage=75V
U1 U2 U3 U4: library part CMP-031-00009-9, "Switching Controller, Current-mode, 900kHz Switching Freq-Max, CMOS, PDSO38", Case/Package=HTSSOP, Frequency=900kHz, Max Supply Voltage=140V, Height - Seated (Max)=1.2mm, Length=9.7mm, Pins=38, RoHS Compliant=Yes, Surface Mount=Yes, Switcher Configuration=BUCK, Throw Configuration="SWITCHING CONTROLLER", Width=4.4mm
U5: library part CMP-031-00007-7, "Power Supply Support Circuit, Adjustable, 2 Channel, CMOS, PDSO16", Case/Package=TSSOP, Max Operating Temperature=85°C, Max Supply Voltage=44V, Min Operating Temperature=-40°C, Min Supply Voltage=4.5V, Temperature Grade=INDUSTRIAL, Adjustable Threshold=Yes, Height - Seated (Max)=1.1mm, Pins=16, RoHS Compliant=Yes, Surface Mount=Yes, Technology=CMOS
U6: library part CMP-019-00046-7, "Prioritized 2:1 PowerPath™ Controller, 2.5 to 40 V, -40 to 85 degC, 20-Pin QFN, RoHS", Case/Package=QFN, Pins=21

## Free pads (board coordinates)
  oval 3.2x0 hole 3.2 unplated: 1(4,76) 1(5,6) 1(50,6) 1(50,76) 1(100,6) 1(100,76) 1(150,6) 1(151,72)

## Via types
v1: diameter 0.75, hole 0.4, Top Layer to Bottom Layer, tented both sides, 240 vias
v2: diameter 0.5, hole 0.2, Top Layer to Bottom Layer, tented both sides, 116 vias

## Nets (pads, with @x,y where several pads share a name; then routed paths per layer and width w, separated by ;. In a path a pad name is that pad's centre, name@x,y a point inside that pad or via, vN(x,y) a via of type N, cw(c..) or ccw(c..) an arc to the next point about the centre after c; other vN are vias at no path point)
5V: C13.1 C16.1 C58.1 J6.2 R3.2 U2.4 U2.6 | length 6.4
  Top Layer w0.254: U2.4@124.5,13 128.025,13 129.9,14.875 R3.2@130.075,14.875
  other v1: 134,10 134,12 137.5,12.5 135.5,13
12V: C10.1 C15.1 C57.1 J5.2 R1.2 R5.2 U1.4 U1.32 U2.32 U3.32 U4.32 | length 175.2
  Top Layer w0.254: v1(66,14.5) U4.32@68.1,14.5 ; U3.32@85.9,65.5 v1(88,65.5) ; v1(116.5,14.5) U2.32@118.6,14.5 ; R1.2@124.925,65.125 125.1,65.125 126.975,67 U1.4@130.5,67 ; U1.32@136.4,65.5 v1(138.5,65.5)
  Layer 2 w0.254: v1(109,62) 111.175,59.825 132.825,59.825 v1(138.5,65.5)
  Layer 2 w1: v1(66,14.5) 80,28.5 102.5,28.5 ; v1(88,65.5) 98,55.5 102.5,55.5 ; v1(116.5,14.5) 102.5,28.5 ; v1(117.498,67.496) 112.002,62 v1(109,62) 102.5,55.5 ; 102.5,28.5 102.5,55.5
  other v1: 119.498,66.996 120.998,67.996 120.998,69.996
19V: C31.1 C34.1 C60.1 J4.2 R9.2 R12.1 U4.4 | length 6.4
  Top Layer w0.254: U4.4@74,13 77.525,13 79.4,14.875 R9.2@79.575,14.875
  other v1: 83.5,10 83.5,12 87,12.5 85,13
24V: C26.1 C33.1 C59.1 J3.2 R7.2 R11.2 U3.4 | length 6.4
  Top Layer w0.254: R7.2@74.425,65.125 74.6,65.125 76.475,67 U3.4@80,67
  other v1: 69,67 67,67.5 70.5,68 70.5,70
ALL_INVALID: U6.9
BATTERY: C38.2 C45.1 J2.2 Q13.D R26.2 U6.16 | length 33.9
  Top Layer w0.254: C45.1@21.609,21.379 21.609,21.365 21.982,20.992 v1(23.144,20.992) 23.151,20.985 24.756,20.985 U6.16@24.758,20.983 ; R26.2@27.87,11.844 27.87,11.13 29,10 35.666,10 36.166,9.5 J2.2@36.45,9.5
  Layer 2 w1: v1(23.144,20.992) 24,20.136 24,14.011 24.586,13.425 34.314,13.425 34.9,12.839 v1(34.9,11)
  other v1: 38,11 36.45,11.5
CHARGER: C40.2 C43.1 J1.1 Q16.D R20.2 U6.17 | length 16.1
  Top Layer w0.254: J1.1@17.55,9.5 17.793,9.743 17.793,10.58 ; 19.057,11.844 R20.2@24.441,11.844 ; C43.1@21.609,19.302 22.656,19.302 23.838,20.483 U6.17@24.758,20.483
  Top Layer w1: Q16.D@16,20 16.698,19.302 C43.1@21.609,19.302
  other v1: 16,11 19.1,11 17.55,11.5
CURRENT_LIMITER: C39.2 Q14.D Q17.D R15.1 R17.2 R21.1 R23.1 U5.3 U5.14 U6.15 | length 30.5
  Top Layer w0.254: R23.1@16,41.596 16.175,41.596 18.022,43.443 U5.14@22.855,43.443 ; v1(24.149,23.175) 24.253,23.07 24.767,23.07 25.683,22.154 U6.15@25.683,21.908 ; U5.3@26.974,43.443 32.128,43.443 33.975,41.596 R15.1@34.15,41.596
  Layer 2 w0.254: v1(19.845,34.135) 19.845,27.478 v1(24.149,23.175)
GND: C1.2 C2.1 C3.2 C4.1 C5.2 C7.1 C8.2 C10.2 C11.1 C12.1 C13.2 C14.1 C17.1 C18.1 C19.2 C20.1 C21.2 C22.2 C24.1 C25.1 C26.2 C27.2 C28.1 C30.1 C31.2 C32.1 C35.1 C36.1 C38.1 C39.1 C40.1 C41.2 C42.1 C43.2 C45.2 C46.2 C47.1 C48.1 C49.1 C50.1 C51.1 C52.1 C53.1 C54.1 C55.1 C56.1 C57.2 C58.2 C59.2 C60.2 J1.2 J2.1 J3.1 J4.1 J5.1 J6.1 Q5.S Q6.S Q11.S Q12.S R6.1 R13.1 R14.1 R18.1 R19.1 R25.1 R28.1 U1.1 U1.9 U1.12 U1.15 U1.16 U1.17 U1.37 U1.39 U2.1 U2.9 U2.12 U2.15 U2.16 U2.17 U2.37 U2.39 U3.1 U3.9 U3.12 U3.15 U3.16 U3.17 U3.37 U3.39 U4.1 U4.9 U4.12 U4.15 U4.16 U4.17 U4.37 U4.39 U5.8 U5.9 U6.8 U6.20 U6.21 | length 34.1
  Top Layer w0.254: U6.20@24.758,18.983 25.683,18.983 U6.21@26.683,19.983 U6.8@28.608,19.983 29.332,19.983 v1(29.847,19.468) ; U4.37@68.1,12 69,12 69.807,12.807 69.807,13.752 70.405,14.35 v2(70.5,14.35) ; U4.1@74,11.5 75.025,11.5 75.732,10.793 76.207,10.793 v1(76.25,10.75) ; v1(77.75,69.25) 77.793,69.207 78.268,69.207 78.975,68.5 U3.1@80,68.5 ; v2(83.5,65.65) 83.595,65.65 84.193,66.248 84.193,67.193 85,68 U3.37@85.9,68 ; U2.37@118.6,12 119.5,12 120.307,12.807 120.307,13.752 120.905,14.35 v2(121,14.35) ; v1(124.475,10.675) 124.475,11.475 U2.1@124.5,11.5 ; v1(128.25,69.25) 128.293,69.207 128.768,69.207 129.475,68.5 U1.1@130.5,68.5 ; v2(134,65.65) 134.095,65.65 134.693,66.248 134.693,67.193 135.5,68 U1.37@136.4,68
  Top Layer w1: R19.1@20.706,38.629 22.029,38.629 v1(22.05,38.608) ; v1(27.363,38.65) 27.384,38.629 R18.1@28.707,38.629 ; v1(29.847,19.468) 31.246,19.468 C46.2@31.246,19.475
  other v1: 75.02,4.499 66.52,5.999 71.52,5.999 117.02,5.999 122.02,5.999 12.474,7.25 41.574,7.25 89.5,9 91.5,9 140,9 142,9 10.2,9.476 39.3,9.476 14.7,9.524 43.8,9.524 26.071,10.5 88.5,10.5 92.5,10.5 139,10.5 143,10.5 12.426,11.75 41.526,11.75 30.865,11.823 153.5,11.975 103,12 66.101,12.02 116.601,12.02 153.5,13.975 103,14 75.999,15.48 153.5,15.975 103,16 21.588,16.458 75.999,16.98 126.499,16.98 110.293,17.293 2,17.5 52,17.5 60,17.5 75.999,18.98 126.499,18.98 2,19.5 52,19.5 2,21.5 52,21.5 22.953,22.858 23,27.5 25,27.5 27,27.5 92.5,34.5 94.5,34.5 96.5,34.5 98.5,34.5 100.5,34.5 143,34.5 145,34.5 147,34.5 149,34.5 151,34.5 64.5,38.5 66.5,38.5 68.5,38.5 115,38.5 117,38.5 119,38.5 71.885,39.4 73.885,39.4 75.885,39.4 122.385,39.4 124.385,39.4 126.385,39.4 78.115,40.6 80.115,40.6 82.115,40.6 128.615,40.6 130.615,40.6 132.615,40.6 85.5,41.5 87.5,41.5 89.5,41.5 136,41.5 138,41.5 140,41.5 53.5,46 55.5,46 57.5,46 59.5,46 61.5,46 104,46 106,46 108,46 110,46 112,46 24,47.5 26,47.5 78.001,61.02 128.501,61.02 94,62.5 144.5,62.5 78.001,63.02 128.501,63.02 51,64 101.5,64 78.001,64.52 128.501,64.52 51,66 101.5,66 87.899,67.979 138.399,67.979 51,68 101.5,68 61.5,69.5 65.5,69.5 111.998,69.496 115.998,69.496 62.5,71 64.5,71 112.998,70.996 114.998,70.996 82.5,74 87.5,74 132.98,74.001 137.98,74.001 9.466,75.203 12.619,75.203 15.773,75.203 18.926,75.203 22.08,75.203 25.233,75.203 28.386,75.203 31.54,75.203 34.693,75.203 37.847,75.203 41,75.203 79,75.5 129.48,75.501
  other v2: 71.6,14.35 122.1,14.35 70.5,15.45 71.6,15.45 121,15.45 122.1,15.45 70.5,16.55 71.6,16.55 121,16.55 122.1,16.55 70.5,17.65 71.6,17.65 121,17.65 122.1,17.65 82.4,62.35 83.5,62.35 132.9,62.35 134,62.35 82.4,63.45 83.5,63.45 132.9,63.45 134,63.45 82.4,64.55 83.5,64.55 132.9,64.55 134,64.55 82.4,65.65 132.9,65.65
NetC2_2: C2.2 Q1.3 U1.26 | length 11
  Top Layer w0.254: U1.26@136.4,62.5 136.412,62.512 136.997,62.512 137.003,62.517 138.983,62.517 141.325,60.175 141.775,60.175 144.25,57.7 Q1.3@144.25,56.58
NetC4_2: C4.2 Q3.3 U2.26 | length 11
  Top Layer w0.254: Q3.3@110.75,23.42 110.75,22.3 113.225,19.825 113.675,19.825 116.017,17.483 117.997,17.483 118.003,17.488 118.588,17.488 U2.26@118.6,17.5
NetC5_1: C5.1 U1.5 | length 9
  Top Layer w0.16: C5.1@129.5,72.25 129.5,72.225 128.75,71.475 128.75,69.75 129.25,69.25 131.25,69.25 131.424,69.076 131.424,66.881 131.043,66.5 U1.5@130.5,66.5